# Altium PCB 插式微步進驅動器.PCBDOC
Units mm, origin at the board's own origin, x right, y up, seen from the top; angles counter-clockwise.
Board outline 152.4 x 101.6 mm, 2 copper layers (Top Layer, Bottom Layer); 26 components, 27 nets, 107 pads, 17 vias.
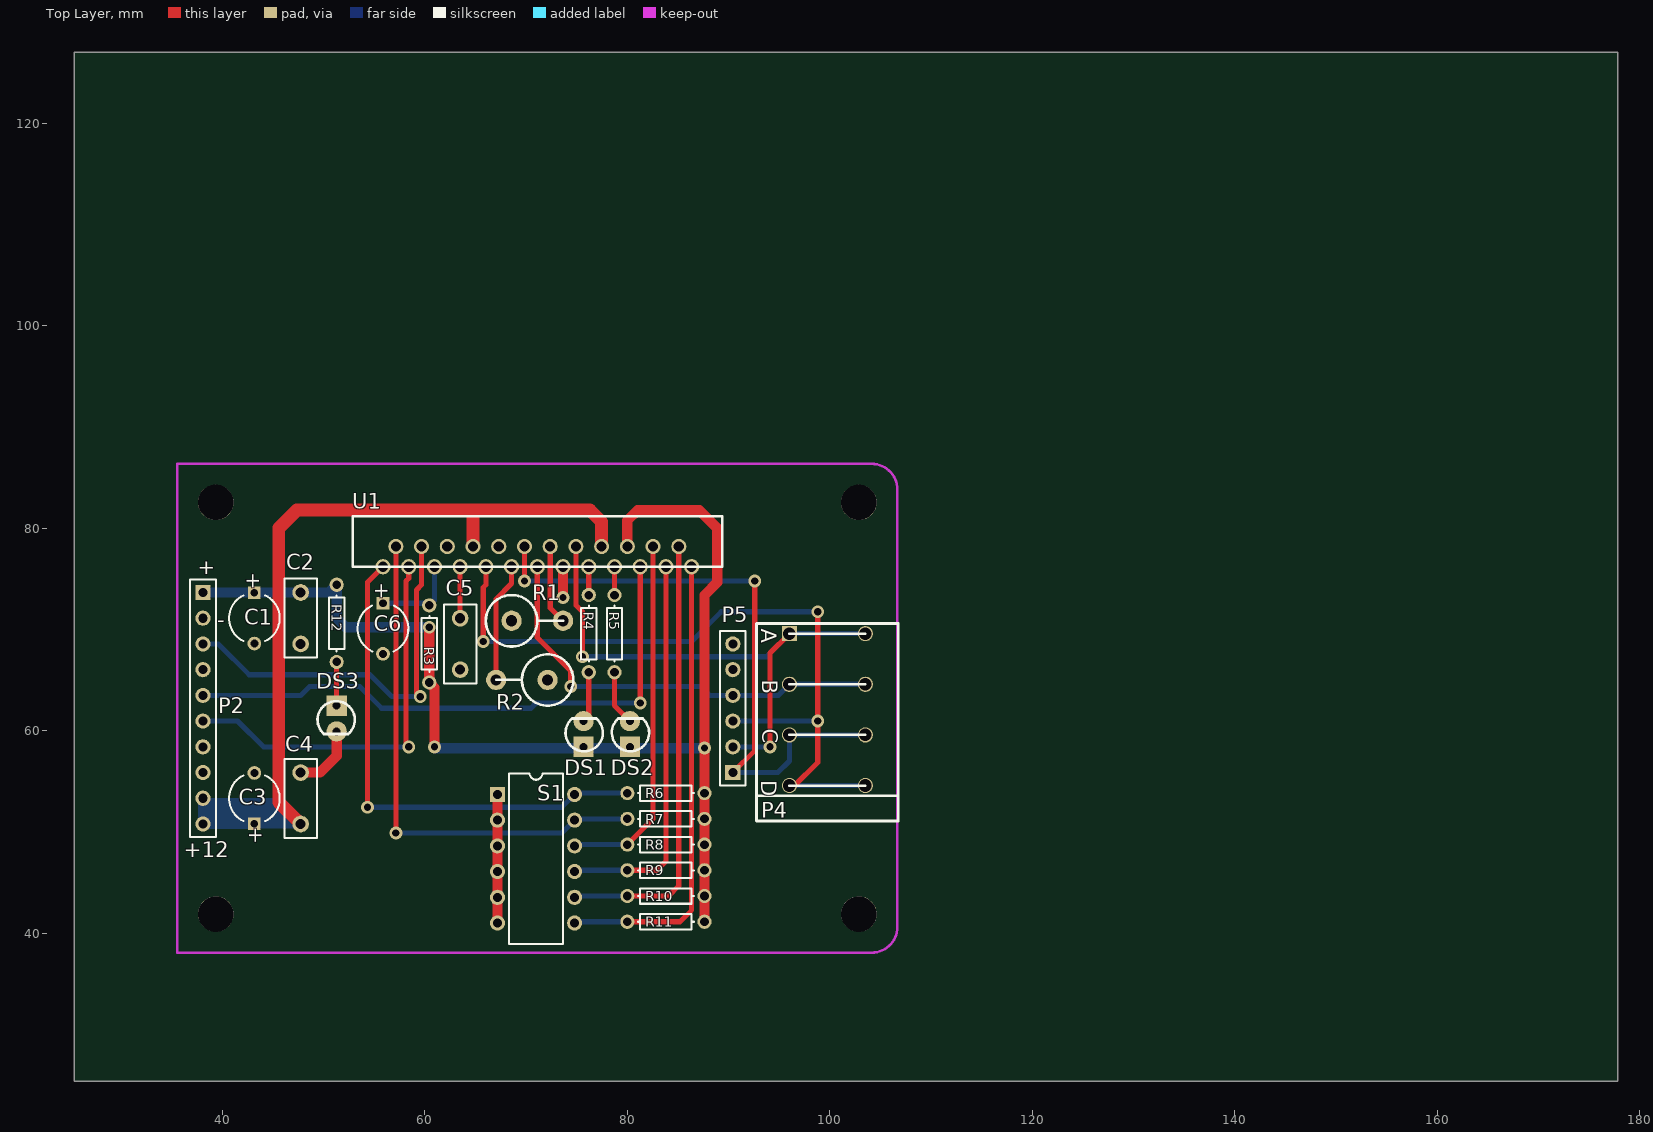
[diagram p0: Top Layer view]
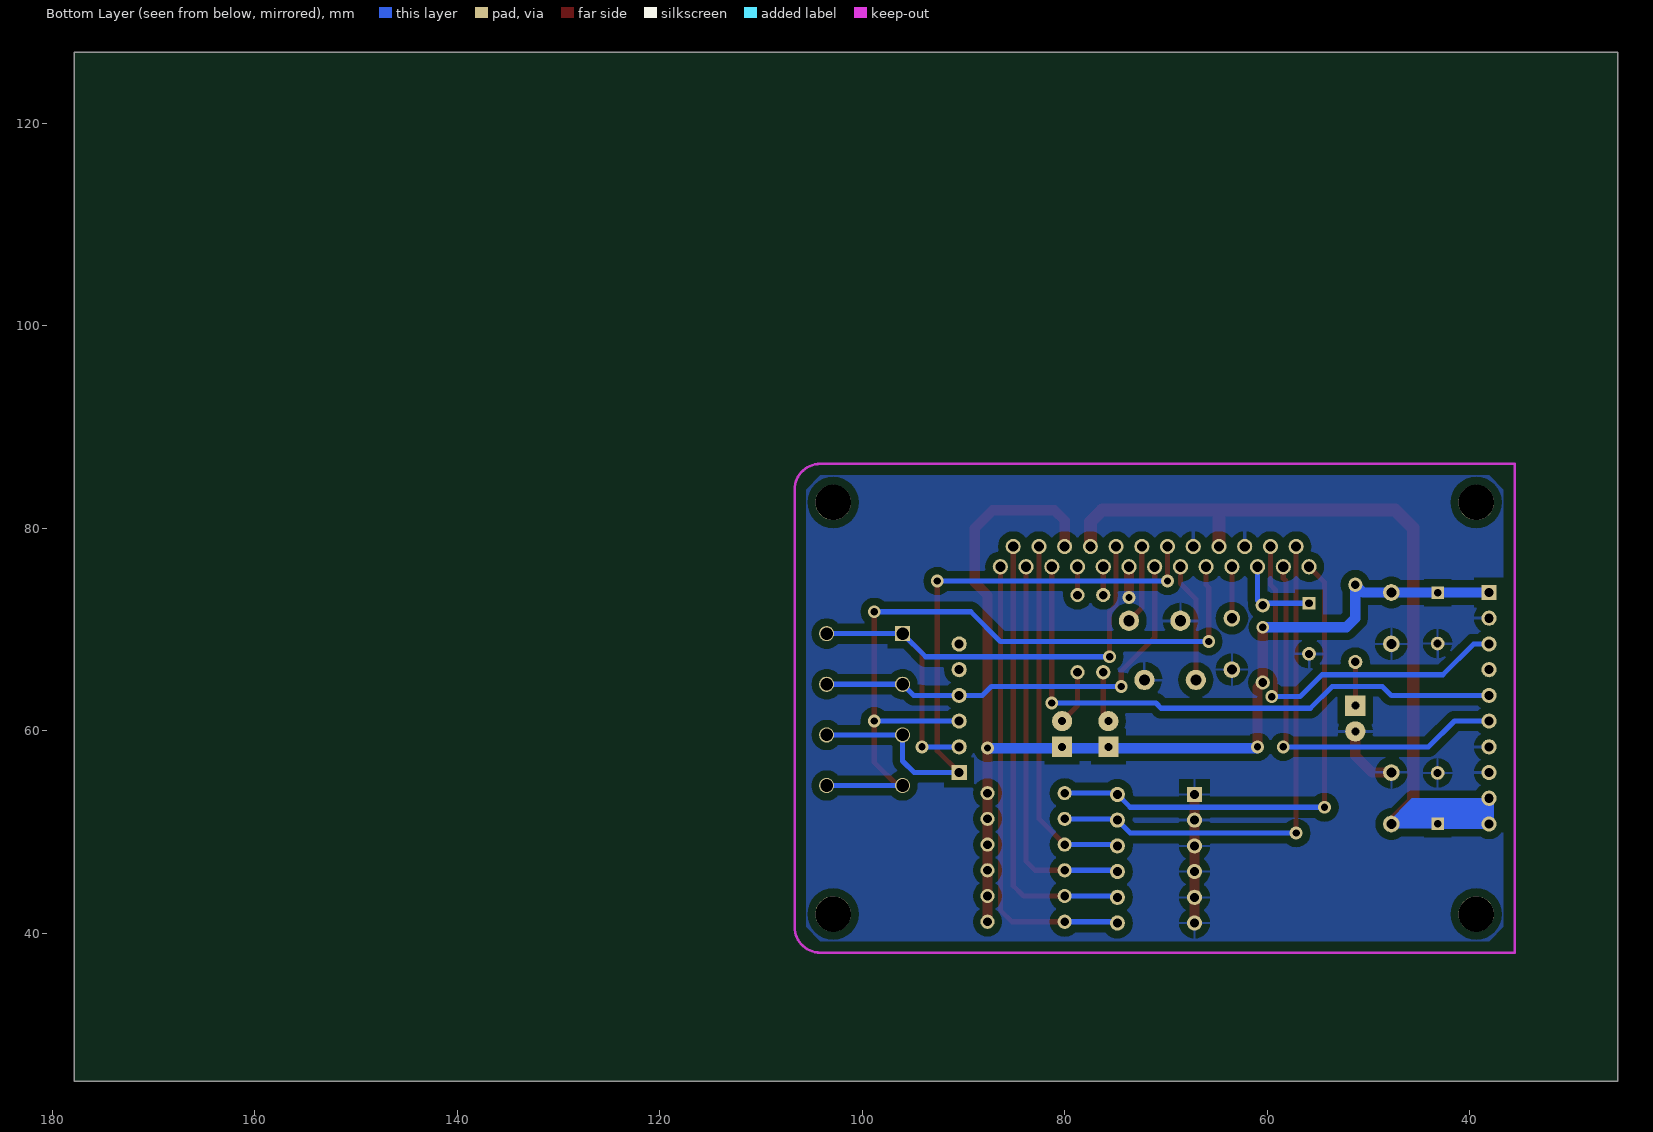
[diagram p1: Bottom Layer view, seen from below]

## Layer stack, top to bottom
Top Layer: signal copper 0.0356
Dielectric: dielectric 0.32, FR-4, Dk 4.8
Bottom Layer: signal copper 0.0356

## Board outline
25.4,25.4 177.8,25.4 177.8,127 25.4,127

## Design rules (kind name [scope] priority, off if disabled: settings)
Clearance [All] p1: gap=0.254
ComponentClearance [All] p1: gap=0.254 collisioncheckmode=0
HoleSize [All] p1: absolutevalues=TRUE maxlimit=3.81 minlimit=0.025 maxpercent=80.000 minpercent=20.000
PolygonConnect [All] p1: connectstyle=Relief reliefconductorwidth=0.254 reliefentries=4 polygonreliefangle="90 Angle"
RoutingVias [All] p1: holewidth=0.711 width=1.27 viastyle="Through Hole" minholewidth=0.711 minwidth=1.27 maxholewidth=0.711 maxwidth=1.27
SolderMaskExpansion [All] p1: expansion=0.102
TestPointUsage [All] p1: valid=0 allowmultiple=FALSE
Testpoint [All] p1: side=15 testpointundercomponent=TRUE minsize=1.016 maxsize=2.54 preferedsize=1.524 minholesize=0 maxholesize=1.016 preferedholesize=0.813 testpointgrid=0.025 style=1023 order=1234567890
Width +12 [InNetClass('+12')] p1: maxlimit=1.27 minlimit=0.254 preferedwidth=1.27
Width power [InNetClass('power')] p2: maxlimit=1.27 minlimit=0.254 preferedwidth=1.016
Width [All] p3: maxlimit=1.27 minlimit=0.254 preferedwidth=0.508
16 further rules are at their usual default settings.

## Classes and differential pairs
net class +12: +12
net class power: +12 GND VCC

## Components (designator, comment, footprint, x,y, rotation, side; value= is the part's Value field where it differs from the comment)
C1 "Cap Pol1" CAPPR5-5x5 43.18,71.12 r270 top
C2 "Cap" CAPR5.08-7.8x3.2 47.752,71.12 r90 top
C3 "Cap Pol1" CAPPR5-5x5 43.18,53.34 r90 top
C4 "Cap" CAPR5.08-7.8x3.2 47.752,53.34 r270 top
C5 "Cap" CAPR5.08-7.8x3.2 63.5,68.58 r90 top
C6 "Cap Pol1" CAPPR5-5x5 55.88,70.104 r270 top
DS1 "LED1" "LED 3mm T" 75.692,58.42 r90 top
DS2 "LED1" "LED 3mm T" 80.264,58.42 r90 top
DS3 "LED1" "LED 3mm T" 51.308,62.484 r270 top
P2 "Header 10" HDR1X10 38.1,73.66 r270 top
P4 "Header 4" 4pin夾式端子台 96.012,69.596 r270 top
P5 "Header 6" HDR1X6 90.424,55.88 r90 top
R1 "Res1" ¹qªý5.08mm 73.66,70.866 r180 top
R2 "Res1" ¹qªý5.08mm 67.056,65.024 r0 top
R3 "Res1" AXIAL-0.3 60.452,68.58 r270 top
R4 "Res1" AXIAL-0.3 76.2,69.596 r270 top
R5 "Res1" AXIAL-0.3 78.74,69.596 r270 top
R6 "Res1" AXIAL-0.3 83.82,53.848 r0 top
R7 "Res1" AXIAL-0.3 83.82,51.308 r0 top
R8 "Res1" AXIAL-0.3 83.82,48.768 r0 top
R9 "Res1" AXIAL-0.3 83.82,46.228 r0 top
R10 "Res1" AXIAL-0.3 83.82,43.688 r0 top
R11 "Res1" AXIAL-0.3 83.82,41.148 r0 top
R12 "Res1" AXIAL-0.3 51.308,70.612 r90 top
S1 "SW DIP-6" DIP-12/SW 70.993,47.371 r270 top
U1 "TB6560" TB6560AHQ 55.88,76.2 r0 top

## Footprints (in the part's own frame and the unit in brackets; to place one, negate y for a bottom-side part, rotate by r counter-clockwise, add the part's x,y. Pads: shape width x height; smd on the part's side, far side on the other; paste and mask are expansions set on the pad)
4pin夾式端子台 [mm]
  round 1.5 hole 1.25: 1(0,7.5) 2(5,7.5) 2(5,0) 3(10,7.5) 3(10,0) 4(15,0) 4(15,7.5)
  rect 1.5x1.5 hole 1.25: 1(0,0)
  silkscreen extent -1,-3.25 18.5,10.75
AXIAL-0.3 [mm] "Resistor; 2 Leads"
  round 1.4 hole 0.85: 1(-3.81,0) 2(3.81,0)
  silkscreen extent -2.77,-0.76 2.77,0.76
CAPPR5-5x5 [mm] "Capacitor, Electrolytic, Radial; Body 5 x 5 mm (Dia.xH typ); Pin Spacing 5 mm (typ)"
  rect 1.25x1.25 hole 0.75: 1(-2.5,0)
  round 1.35 hole 0.8: 2(2.5,0)
  silkscreen extent -2.26,-2.5 2.27,2.5
CAPR5.08-7.8x3.2 [mm] "Capacitor, Ceramic, Thru-Hole, Dipped Radial; Body 7.8 x 3.2 mm (WxT) Pin Spacing 5.08 mm (typ)"
  round 1.65 hole 1: 1(-2.54,0) 2(2.54,0)
  silkscreen extent -3.9,-1.6 3.9,1.6
DIP-12/SW [mm] "DIP Switch; 12 Leads"
  rect 1.5x1.5 hole 0.9: 1(-6.35,-3.81)
  round 1.5 hole 0.9: 2(-3.81,-3.81) 3(-1.27,-3.81) 4(1.27,-3.81) 5(3.81,-3.81) 6(6.35,-3.81) 7(6.35,3.81) 8(3.81,3.81) 9(1.27,3.81) 10(-1.27,3.81) 11(-3.81,3.81) 12(-6.35,3.81)
  silkscreen extent -8.43,-2.65 8.41,2.65
HDR1X6 [mm] "Connector; Header; 6 Position"
  rect 1.5x1.5 hole 0.9: 1(0,0)
  round 1.5 hole 0.9: 2(2.54,0) 3(5.08,0) 4(7.62,0) 5(10.16,0) 6(12.7,0)
  silkscreen extent -1.27,-1.27 13.97,1.27
HDR1X10 [mm] "Connector; Header; 10 Position"
  rect 1.5x1.5 hole 0.9: 1(0,0)
  round 1.5 hole 0.9: 2(2.54,0) 3(5.08,0) 4(7.62,0) 5(10.16,0) 6(12.7,0) 7(15.24,0) 8(17.78,0) 9(20.32,0) 10(22.86,0)
  silkscreen extent -1.27,-1.27 24.13,1.27
"LED 3mm T" [mm]
  rect 2x2 hole 0.8: 1(0,0)
  round 2 hole 0.8: 2(2.54,0)
  silkscreen extent -0.45,-1.89 2.8,1.79
TB6560AHQ [mm]
  round 1.5 hole 1: 1(0,0) 2(1.27,2) 3(2.54,0) 4(3.81,2) 5(5.08,0) 6(6.35,2) 7(7.62,0) 8(8.89,2) 9(10.16,0) 10(11.43,2) 11(12.7,0) 12(13.97,2) 13(15.24,0) 14(16.51,2) 15(17.78,0) 16(19.05,2) 17(20.32,0) 18(21.59,2) 19(22.86,0) 20(24.13,2) 21(25.4,0) 22(26.67,2) 23(27.94,0) 24(29.21,2) 25(30.48,0)
  silkscreen extent -3,0 33.48,5
¹qªý5.08mm [mm]
  round 2 hole 1.1: 1(0,0) 2(5.08,0)
  silkscreen extent 0,-2.54 7.62,2.54

## Part data
C1 C3 C6: "Polarized Capacitor (Radial)"
C2 C4 C5: "Capacitor"
DS1 DS2 DS3: "Typical RED GaAs LED"
P2: "Header, 10-Pin"
P5: "Header, 6-Pin"
R1 R2 R3 R4 R5 R6 R7 R8 R9 R10 R11 R12: "Resistor"
S1: "DIP Switch"

## Free pads (board coordinates)
  round 3.5 hole 3.5: 0(39.37,82.55) 1(39.37,41.91) 2(102.87,41.91) 3(102.87,82.55)

## Via types
v1: diameter 1.27, hole 0.711, Top Layer to Bottom Layer, 17 vias

## Nets (pads, with @x,y where several pads share a name; then routed paths per layer and width w, separated by ;. In a path a pad name is that pad's centre, name@x,y a point inside that pad or via, vN(x,y) a via of type N, cw(c..) or ccw(c..) an arc to the next point about the centre after c; other vN are vias at no path point)
+12: C3.1 C4.2 P2.9 P2.10 U1.8 U1.18 | length 81.4
  Top Layer w1.27: C4.2 45.593,52.959 45.593,80.01 47.371,81.788 76.327,81.788 77.47,80.645 U1.18 ; U1.8 64.77,81.788
  Bottom Layer w1.016: P2.9 P2.10 43.14,50.8 C3.1 47.712,50.84 C4.2
A: P4.1 P5.2 U1.16 | length 56.2
  Top Layer w0.508: U1.16 74.93,72.39 75.565,71.755 v1(75.565,67.31) ; v1(94.107,58.42) 94.107,67.691 P4.1@96.012,69.596
  Bottom Layer w0.508: v1(75.565,67.31) 93.726,67.31 96.012,69.596 P4.1@104.02,69.596 ; P5.2 v1(94.107,58.42)
B: P4.2 P5.4 U1.13 | length 43.1
  Top Layer w0.508: U1.13 71.12,69.215 74.422,65.913 v1(74.422,64.389)
  Bottom Layer w0.508: v1(74.422,64.389) 87.249,64.389 88.138,63.5 94.916,63.5 96.012,64.596 P4.2@103.512,64.596
C: P4.3 P5.1 U1.12 | length 62.1
  Top Layer w0.508: v1(69.85,74.803) U1.12 ; P5.1 92.583,58.039 v1(92.583,74.803)
  Bottom Layer w0.508: v1(69.85,74.803) v1(92.583,74.803) ; P5.1 94.869,55.88 96.012,57.023 96.012,59.596 P4.3@103.512,59.596
COM1: P5.5
COM2: P5.6
D: P4.4 P5.3 U1.9 | length 76.2
  Top Layer w0.508: v1(65.786,68.834) 65.786,74.168 66.04,74.422 U1.9 ; P4.4@96.52,54.596 98.806,56.882 v1(98.806,71.755)
  Bottom Layer w0.508: v1(65.786,68.834) 86.36,68.834 89.281,71.755 v1(98.806,71.755) ; P5.3 v1(98.806,60.96) ; P4.4@96.012,54.596 P4.4@104.02,54.596
GND: C1.2 C2.1 C3.2 C4.1 C5.1 C6.2 DS3.2 P2.2 P2.7 P2.8 R1.2 R2.2 S1.1 S1.2 S1.3 S1.4 S1.5 S1.6 U1.6 U1.10 U1.15 | length 24.9
  Top Layer w1.016: C4.1 49.657,55.88 51.308,57.531 DS3.2 ; S1.6 S1.1 ; S1.3 S1.2 ; v1(73.66,73.152) U1.15
NetC5_2: C5.2 U1.7 | length 5.1
  Top Layer w0.508: C5.2 U1.7
NetC6_1: C6.1 R3.1 U1.5 | length 8.7
  Bottom Layer w0.508: C6.1 60.238,72.604 R3.1 60.96,72.898 U1.5
NetDS1_2: DS1.2 R4.2 | length 5
  Top Layer w0.508: DS1.2 76.2,61.468 R4.2
NetDS2_2: DS2.2 R5.2 | length 5.5
  Top Layer w0.508: R5.2 78.74,62.484 DS2.2
NetDS3_1: DS3.1 R12.1 | length 3.3
  Top Layer w0.508: DS3.1@51.308,62.865 R12.1@51.308,66.167
NetP2_3: P2.3 U1.4 | length 38.8
  Top Layer w0.508: v1(59.563,63.373) 59.182,63.754 59.182,73.914 59.69,74.422 U1.4
  Bottom Layer w0.508: P2.3 39.624,68.58 42.672,65.532 54.61,65.532 56.769,63.373 v1(59.563,63.373)
NetP2_5: P2.5 U1.21 | length 58.1
  Top Layer w0.508: v1(81.28,62.738) U1.21
  Bottom Layer w0.508: P2.5 47.752,63.5 48.641,64.389 53.594,64.389 55.753,62.23 70.485,62.23 70.993,62.738 v1(81.28,62.738)
NetP2_6: P2.6 U1.3 | length 39.4
  Top Layer w0.508: v1(58.42,58.42) 58.166,58.674 58.166,74.803 58.42,75.057 U1.3
  Bottom Layer w0.508: P2.6 41.529,60.96 44.069,58.42 v1(58.42,58.42)
NetR1_1: R1.1 U1.14 | length 7.9
  Top Layer w0.508: U1.14 72.39,72.136 R1.1
NetR2_1: R2.1 U1.11 | length 11.8
  Top Layer w0.508: R2.1 67.056,73.025 68.58,74.549 U1.11
NetR4_1: R4.1 U1.17 | length 2.8
  Top Layer w0.508: R4.1 U1.17
NetR5_1: R5.1 U1.19 | length 2.8
  Top Layer w0.508: R5.1 U1.19
NetR6_1: R6.1 S1.12 U1.1 | length 50.6
  Top Layer w0.508: v1(54.356,52.451) 54.356,74.676 U1.1
  Bottom Layer w0.508: v1(54.356,52.451) 73.533,52.451 74.93,53.848 R6.1
NetR7_1: R7.1 S1.11 U1.2 | length 51.7
  Top Layer w0.508: v1(57.15,49.911) U1.2
  Bottom Layer w0.508: v1(57.15,49.911) 73.533,49.911 74.93,51.308 R7.1
NetR8_1: R8.1 S1.10 U1.22 | length 35.7
  Top Layer w0.508: R8.1 82.55,51.308 U1.22
  Bottom Layer w0.508: S1.10 74.93,48.768 R8.1
NetR9_1: R9.1 S1.9 U1.23 | length 38.5
  Top Layer w0.508: R9.1 82.931,46.228 83.82,47.117 U1.23
  Bottom Layer w0.508: S1.9 74.93,46.228 R9.1
NetR10_1: R10.1 S1.8 U1.24 | length 44.3
  Top Layer w0.508: R10.1 84.074,43.688 85.09,44.704 U1.24
  Bottom Layer w0.508: S1.8 74.93,43.688 R10.1
NetR11_1: R11.1 S1.7 U1.25 | length 46
  Top Layer w0.508: R11.1 85.217,41.148 86.36,42.291 U1.25
  Bottom Layer w0.508: S1.7 74.93,41.148 R11.1
VCC: C1.1 C2.2 DS1.1 DS2.1 P2.1 R3.2 R6.2 R7.2 R8.2 R9.2 R10.2 R11.2 R12.2 U1.20 | length 117.1
  Top Layer w1.016: v1(60.452,70.231) R3.2 60.96,64.262 v1(60.96,58.42) ; U1.20 80.01,80.772 81.026,81.788 87.122,81.788 88.9,80.01 88.9,74.676 87.63,73.406 R11.2
  Bottom Layer w1.016: P2.1 50.546,73.66 R12.2 51.308,71.12 52.197,70.231 v1(60.452,70.231) ; v1(60.96,58.42) 61.087,58.293 v1(87.63,58.293)
pads on no net: P2.4

## Polygon pours and split planes (outlines as drawn)
GND on Bottom Layer (solid, remove dead copper): 38.1,39.243 36.703,40.64 36.703,83.82 38.1,85.217 104.14,85.217 105.537,83.82 105.537,40.64 104.14,39.243

## Keep-outs
Keep-Out Layer:
  lines w0.254: 35.56,38.1 35.56,86.36 104.14,86.36 cw(c104.14,83.82) 106.68,83.82 106.68,40.64 cw(c104.14,40.64) 104.14,38.1 35.56,38.1

## Other copper
Bottom Layer:
  region net +12: 38.1,53.34 45.72,53.34 48.26,50.8 38.1,50.8

## Silkscreen, mask and mechanical layers (free items; w line width, h text height)
Top Overlay:
  text "+" at 37.592,75.438 h1.52
  text "-" at 39.497,70.231 h1.52
  text "A" at 93.218,70.104 h1.52 r270
  text "B" at 93.345,65.024 h1.52 r270
  text "C" at 93.345,60.198 h1.52 r270
  text "D" at 93.218,55.118 h1.52 r270
  text "+12" at 36.195,47.498 h1.54

## Text inside footprints (layer, text, board x,y; h text height)
C1: Top Overlay "+" at 42.43,75.67 h1.5 r270
C3: Top Overlay "+" at 43.93,48.79 h1.5 r90
C6: Top Overlay "+" at 55.13,74.654 h1.5 r270